# Altium PCB KSG_REFLOW_0825_BOARD.PcbDoc
Units mm, origin at the board's own origin, x right, y up, seen from the top; angles counter-clockwise.
Board outline 37 x 13.8 mm, 2 copper layers (Top Layer, Bottom Layer), stack 0.98 mm thick; 4 components, 3 nets, 22 pads, 3 vias.
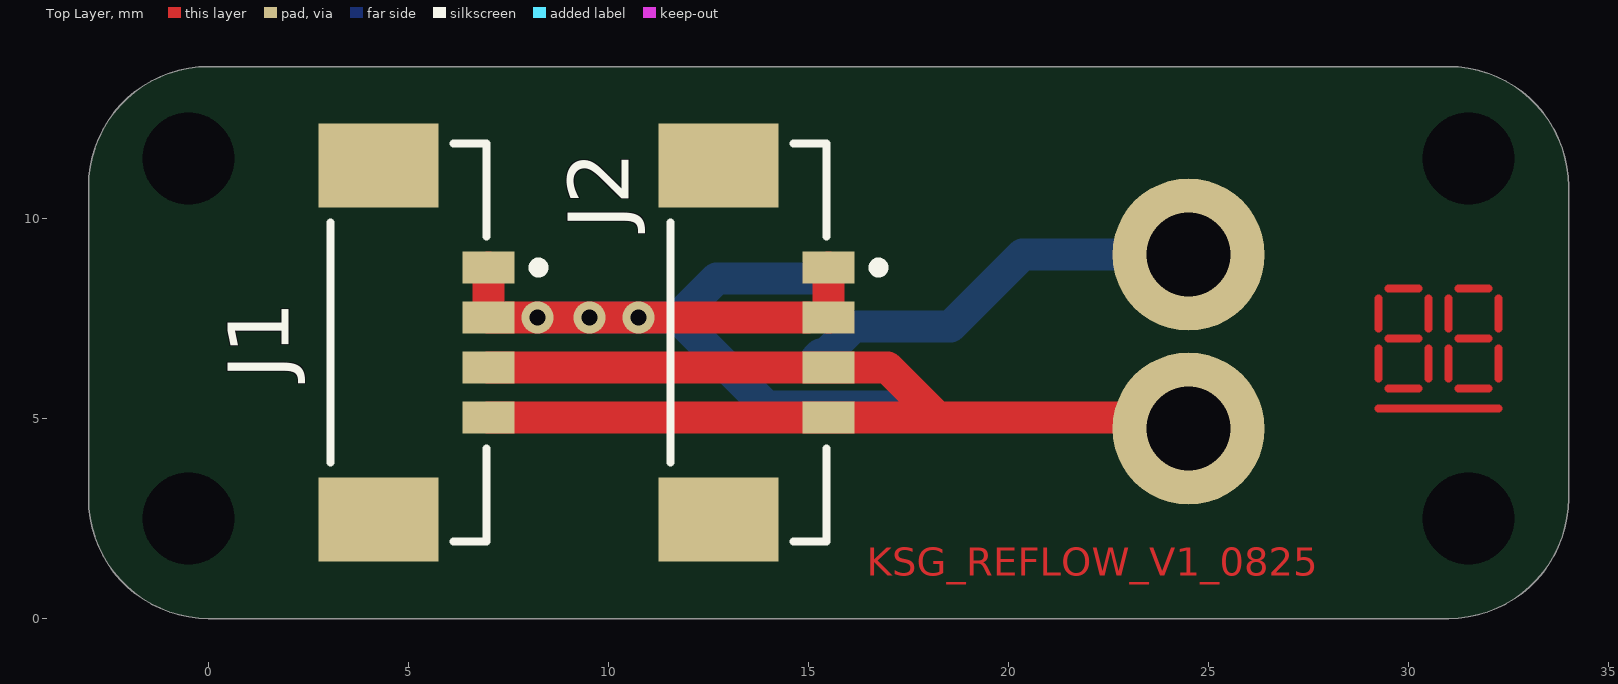
[diagram p0: Top Layer view]
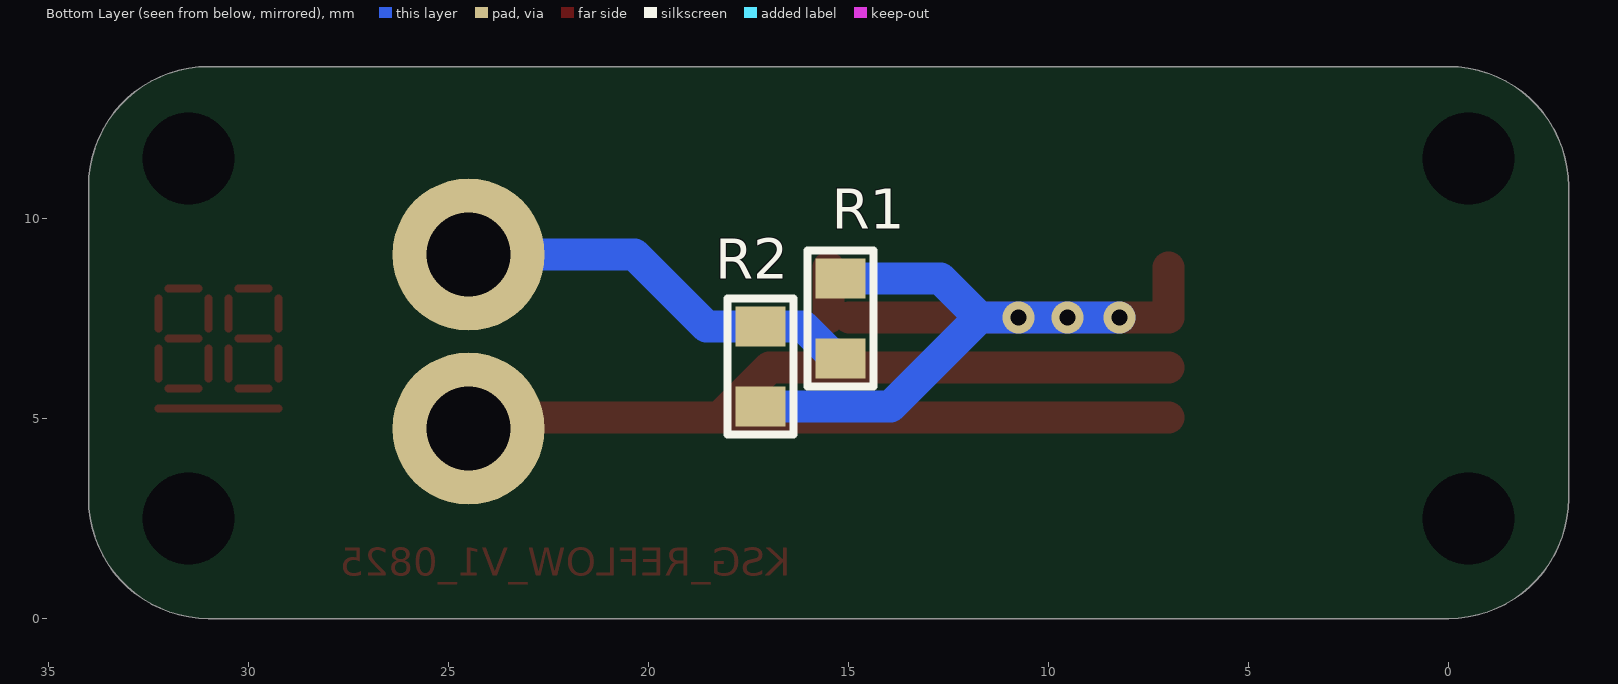
[diagram p1: Bottom Layer view, seen from below]

## Layer stack, top to bottom
Top Solder: solder mask 0.0102, Solder Resist, Dk 3.5
Top Layer: signal copper 0.0356
Dielectric 1: dielectric 0.9086, FR-4, Dk 4.8
Bottom Layer: signal copper 0.0356
Bottom Solder: solder mask 0.0102, Solder Resist, Dk 3.5

## Board outline
-3,3 ccw(c0,3) 0,0 31,0 ccw(c31,3) 34,3 34,10.8 ccw(c31,10.8) 31,13.8 0,13.8 ccw(c0,10.8) -3,10.8

## Design rules (kind name [scope] priority, off if disabled: settings)
Clearance [All] p1: gap=0.254 ignorepadtopadclearanceinfootprint=FALSE except(0: Arc-Hole Track-Hole SMDPad-Hole THPad-Hole Via-Hole Fill-Hole Poly-Hole Region-Hole Text-Hole; 0.3: Arc-Arc Arc-Track Track-Track)
PolygonConnect [All] p1: connectstyle=Relief reliefconductorwidth=0.254 reliefentries=4 polygonreliefangle="90 Angle" airgapwidth=0.254
RoomDefinition main [InComponentClass('main')] p1: confinementstyle=ConfineIn formatcopy=TRUE lockcomponents=FALSE outline -81,-74 -30.2,-74 -30.2,-48.6 -81,-48.6
RoutingVias [All] p1: holewidth=0.6 width=1 viastyle="Through Hole" minholewidth=0.4 minwidth=0.7 maxholewidth=0.711 maxwidth=1.27
SolderMaskExpansion [All] p1: expansion=0.102 istentingtop=FALSE
Width [All] p1: maxlimit=0.8 minlimit=0.125 preferedwidth=0.3
30 further rules are at their usual default settings.

## Components (designator, comment, footprint, x,y, rotation, side; value= is the part's Value field where it differs from the comment)
J1 "533980471" FP-533980471-MFG 5,6.9 r90 top
J2 "533980471" FP-533980471-MFG 13.5,6.9 r90 top
R1 "Resistor film, 100R, , 0805, 0.125W, -55...+125°C" "RES: 0805" 15.2,7.5 r270 bottom value=100R
R2 "Resistor film, 100R, , 0805, 0.125W, -55...+125°C" "RES: 0805" 17.2,6.3 r90 bottom value=100R

## Footprints (in the part's own frame and the unit in brackets; to place one, negate y for a bottom-side part, rotate by r counter-clockwise, add the part's x,y. Pads: shape width x height; smd on the part's side, far side on the other; paste and mask are expansions set on the pad)
FP-533980471-MFG [mm]
  rect 0.8x1.3 smd paste+0 mask+0: 1(1.875,-2) 2(0.625,-2) 3(-0.625,-2) 4(-1.875,-2)
  rect 2.1x3 smd paste+0 mask+0: 5(-4.425,0.75) 6(4.425,0.75)
  silkscreen extent -4.97,-3.38 4.97,1.95, body extent -5.58,-2.75 5.58,2.35, height 0.25
"RES: 0805" [mm]
  rect 1x1.25 smd: 1(-1,0) 2(1,0)
  silkscreen extent -1.7,-0.82 1.7,0.82, body extent -1,-0.6 1,0.6, height 0.44

## Part data
J1 J2: library part CMP-04776-000105-1, "CONN HEADER SMD 4POS 1.25MM", Ambient Temperature Range High=+105°C, Ambient Temperature Range Low=-40°C, Current Rating=1A, Manufacturer=Molex, Package=0, Temperature="-40°C to +105°C", Voltage Rating=125V, Automotive=No, Category=Conn, ComponentLink2Description=Datasheet, ComponentLink2URL=https://www.molex.com/pdm_docs/ps/PS-51021-024-001.pdf, Conn Gender=Male, Conn Orientation=Vertical, Contact Material=Tin, Device Class L1=Connectors, Device Class L2="Headers and Wire Housings", Device Class L3=unset, Digikey Description="CONN HEADER SMD 4POS 1.25MM", Footprint Url=https://www.molex.com/pdm_docs/sd/533980471_sd.pdf, Height=5.1mm, Lead Free=Yes, Manufacturer Part Number=533980471, Number Of Contacts=4, Number Of Rows=1, Octopart=https://octopart.com/53398-0471-molex-655296, Pitch=1.25mm, RoHS=TRUE, Standoff Height=0.05mm, Temperature Range High=+105°C, Temperature Range Low=-40°C
R1 R2: library part Resistor_0805, Manufacturer=Yageo, Package=0805, PartNumber=RC0805JR-07100RL, Power=0.125W, Temperature=-55...+125°C, TypeResistor="Resistor film", HelpURL=https://www.digikey.com/product-detail/en/yageo/RC0805JR-07100RL/311-100ARCT-ND/731185, ValueManufacturerPartNumber="Resistor film, 100R, , 0805, 0.125W, -55...+125°C"

## Free pads (board coordinates)
  round 1.524 hole 2.3 unplated: 4(-0.5,2.5) 4(-0.5,11.5) 4(31.5,2.5) 4(31.5,11.5)
  round 3.8 hole 2.1: 5(24.5,9.1) 6(24.5,4.75)

## Via types
v1: diameter 0.8, hole 0.4, Top Layer to Bottom Layer, 3 vias

## Nets (pads, with @x,y where several pads share a name; then routed paths per layer and width w, separated by ;. In a path a pad name is that pad's centre, name@x,y a point inside that pad or via, vN(x,y) a via of type N, cw(c..) or ccw(c..) an arc to the next point about the centre after c; other vN are vias at no path point)
NetJ1_1: J1.1 J1.2 J2.1 J2.2 R1.1 R2.1 | length 24.4
  Top Layer w0.8: J1.1 J1.2 v1(8.225,7.525) v1(9.525,7.525) v1(10.75,7.525) J2.2@14.975,7.525 ; J2.2 J2.1
  Bottom Layer w0.8: v1(8.225,7.525) v1(9.525,7.525) v1(10.75,7.525) 11.725,7.525 ; R1.1 15.125,8.575 15.05,8.5 12.7,8.5 11.725,7.525 ; R2.1@17.15,5.25 R2.1 13.95,5.3 11.725,7.525
"Screw 1": pad.5 R1.2 R2.2 | length 10.6
  Bottom Layer w0.8: R1.2 15.3,6.6 15.425,6.6 16.125,7.3 18.55,7.3 20.35,9.1 pad.5 pad.5@24.375,9.225
"Screw 2": J1.3 J1.4 J2.3 J2.4 pad.6 | length 29.4
  Top Layer w0.8: J1.4 J2.4 18.225,5.025 ; J1.3 J2.3 16.975,6.275 18.225,5.025 ; pad.6 23.688,4.75 23.413,5.025 18.225,5.025
pads on no net: J1.5 J1.6 J2.5 J2.6
copper on no net: | length 13.5
  Top Layer w0.2: 29.25,5.25 32.25,5.25 ; 29.25,6 29.25,6.75 ; 29.25,7.25 29.25,8 ; 29.5,5.75 30.25,5.75 ; 29.5,7 30.25,7 ; 29.5,8.25 30.25,8.25 ; 30.5,6 30.5,6.75 ; 30.5,7.25 30.5,8 ; 31,6 31,6.75 ; 31,7.25 31,8 ; 31.25,5.75 32,5.75 ; 31.25,7 32,7 ; 31.25,8.25 32,8.25 ; 32.25,6 32.25,6.75 ; 32.25,7.25 32.25,8

## Other copper
Top Layer:
  text "KSG_REFLOW_V1_0825" at 16.45,1.067 h0.7

## Silkscreen, mask and mechanical layers (free items; w line width, h text height)
Top Solder:
  rectangle: 16.25,0.75 29,2
  region: 29,8.5 29,5 32.5,5 32.5,8.5
Mechanical 1:
  the board outline again, w0.254